# EAGLE board APU_PayloadBoard_Footprint (EAGLE 9.7.0)
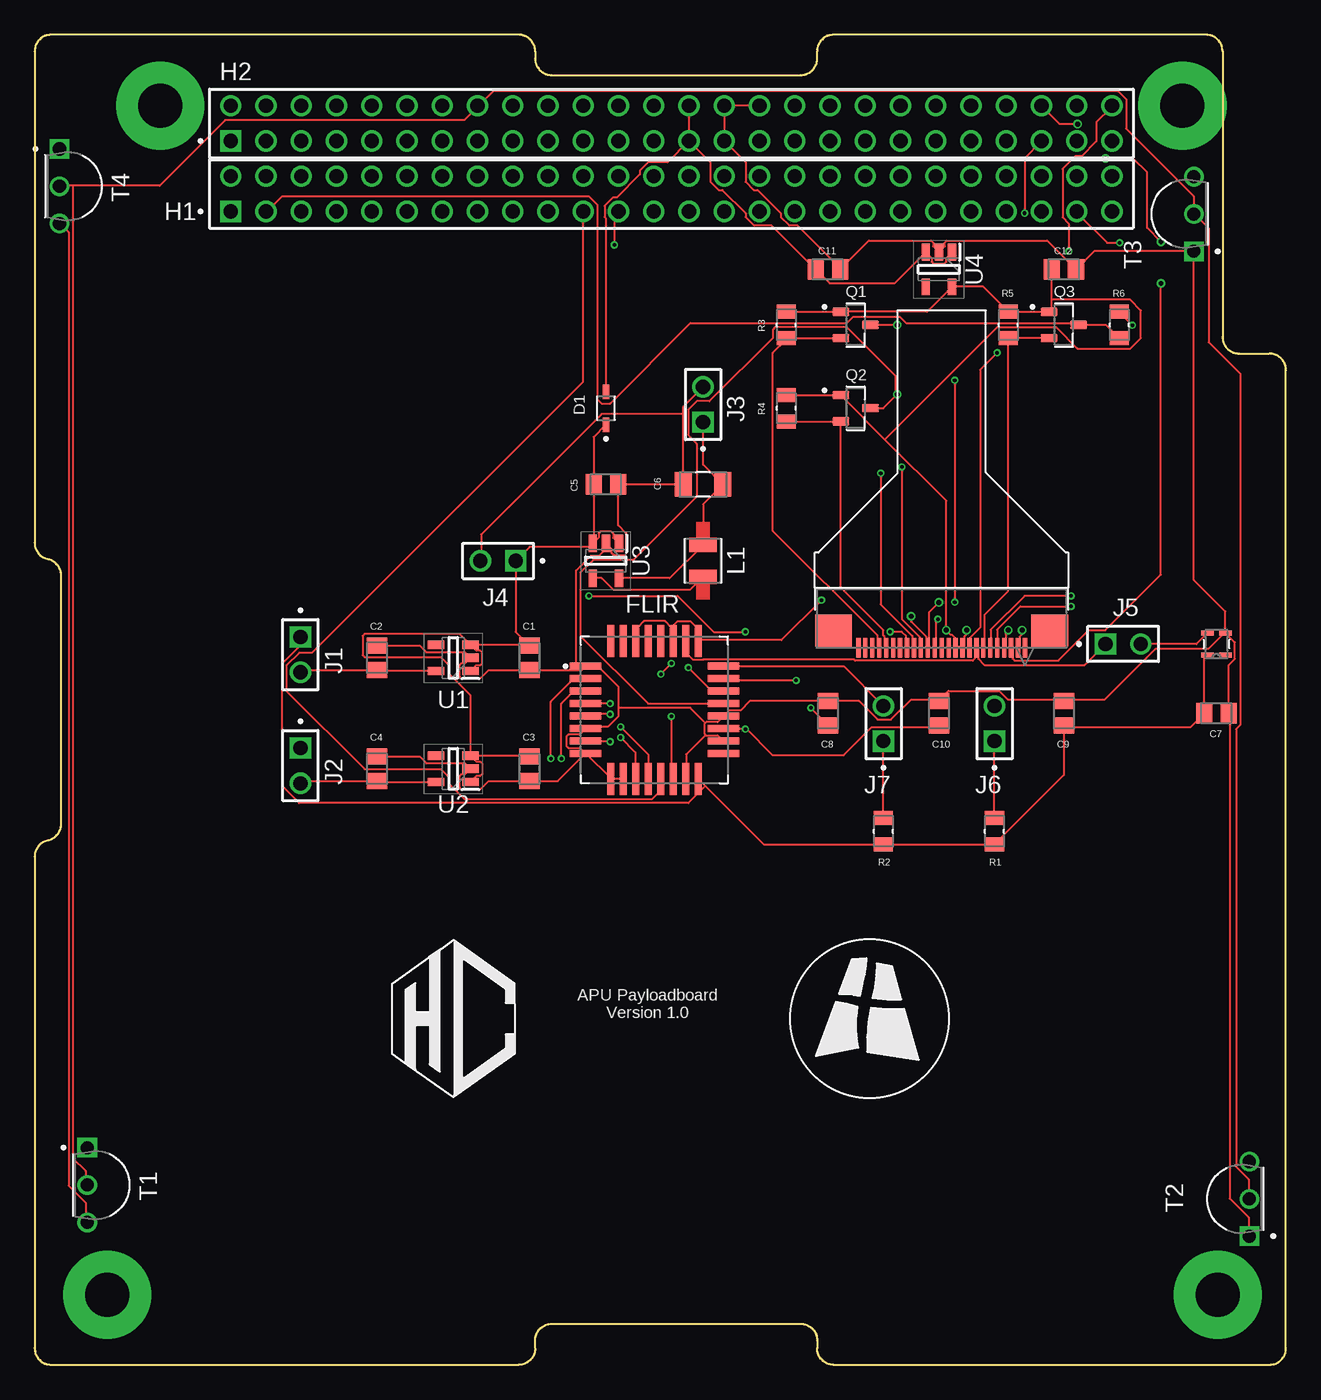
[diagram p0: board, top side]
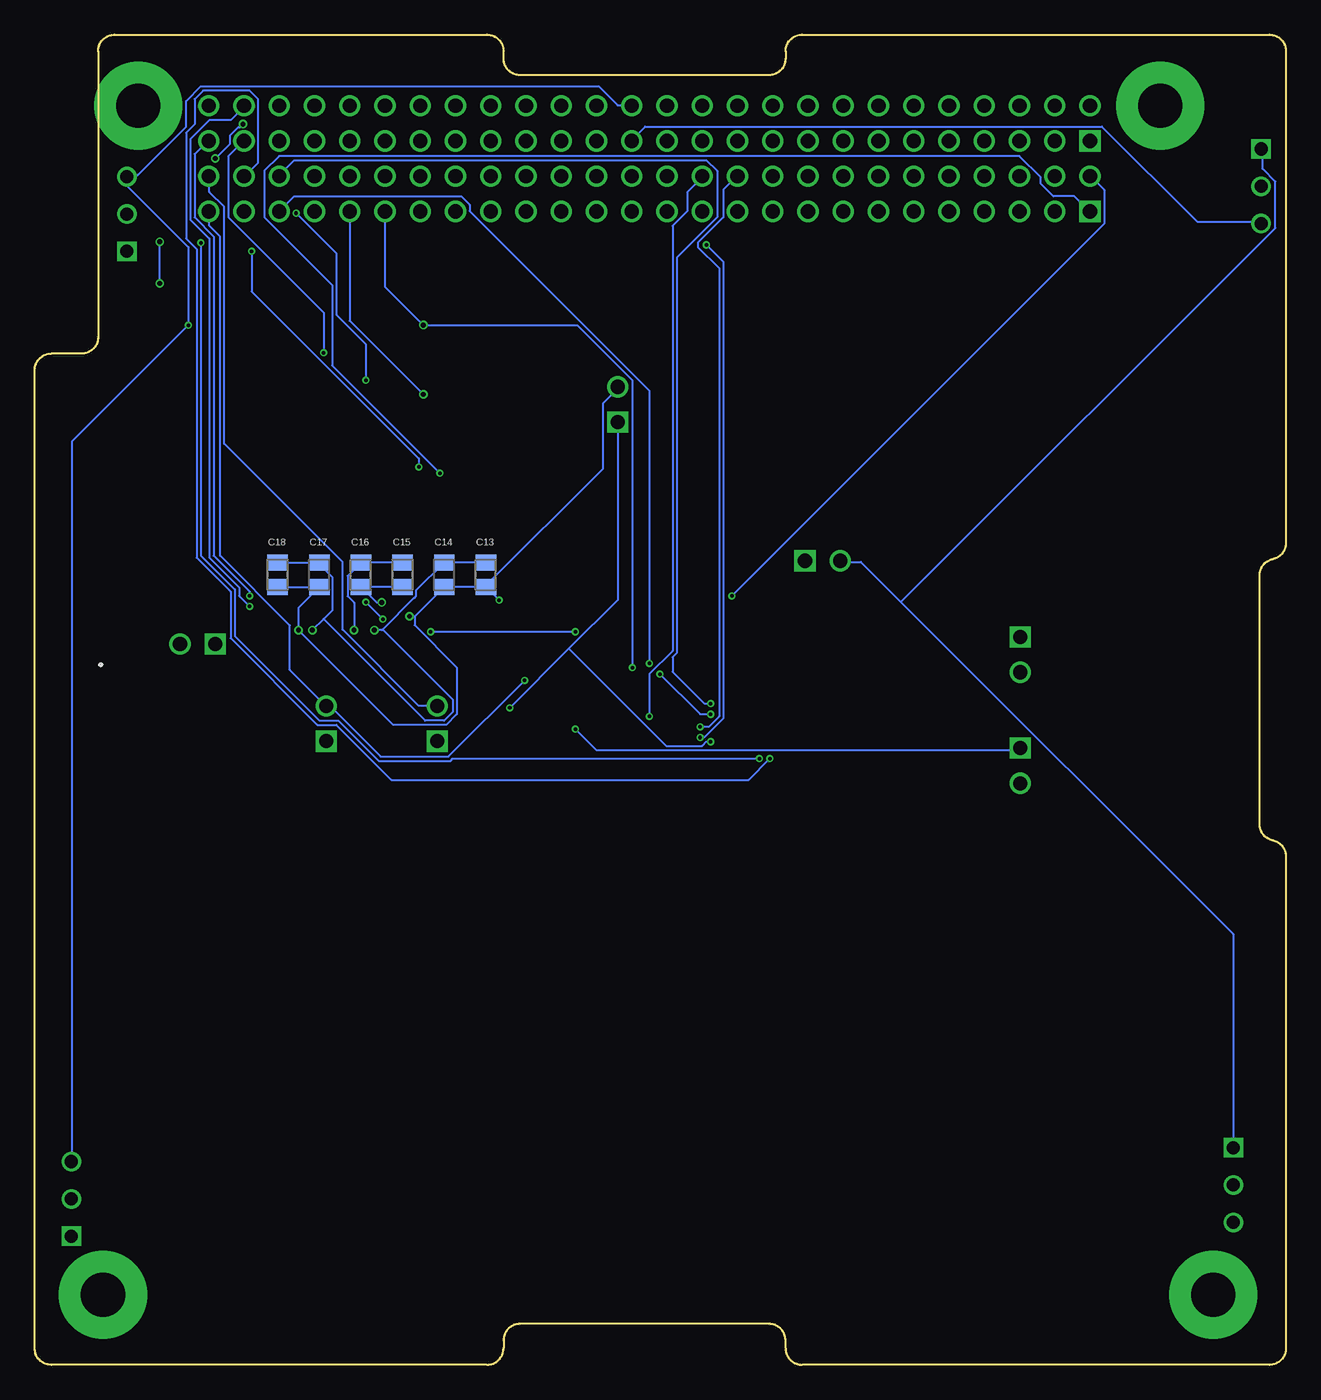
[diagram p1: board, bottom side, seen from below]

Size 90.17 x 95.89 mm. Coordinates in mm from the lower left corner, seen from the top.
Outline: 57.58,0 88.98,0 arc90 90.17,1.19 90.17,71.7 arc90 88.98,72.9 86.79,72.9 arc-90 85.6,74.09 85.6,94.69 arc90 84.4,95.88 57.58,95.88 arc90 56.39,94.69 56.39,94.16 arc-90 55.19,92.96 37.26,92.96 arc-90 36.07,94.16 36.07,94.69 arc90 34.87,95.88 1.19,95.88 arc90 0,94.69 0,59.25 arc78 0.95,58.08 arc-78 1.91,56.91 1.91,38.98 arc-78 0.95,37.81 arc78 0,36.64 0,1.19 arc90 1.19,0 34.87,0 arc90 36.07,1.19 36.07,1.76 arc-90 37.26,2.95 55.19,2.95 arc-90 56.39,1.76 56.39,1.19 arc90 57.58,0
Copper layers (1*16): Top 0.035559375mm / dielectric 1.6mm / Bottom 0.035559375mm
Design rules "oshpark-2layer": minimum track width 6mil, minimum drill 10mil, track to track 6mil, track to pad 6mil, pad to pad 6mil, via to via 6mil, smd to smd 6mil, copper to edge 15mil, drill to drill 6mil, minimum pad ring 5mil, minimum via ring 5mil, stop-mask expansion 2.5mil, vias tented up to drill 0mil, thermal gap 10mil

## Footprints (pad centres in the part's own frame; a part is rotated, then mirrored left to right if it is on the bottom)
CAPC2012X94N = smd 1.16 x 1.47: 1 -0.88,0; 2 0.88,0
CAPC2012X152N = smd 1.16 x 1.47: 1 -0.88,0; 2 0.88,0
CAPC3216X180N = smd 1.21 x 1.77: 1 -1.428,0; 2 1.428,0
SOD2513X120N = smd 1.04 x 0.46: A 1.19,0; C -1.19,0
MOLEX_105028-1001 = smd 2.286 x 0.5: 1 -4.97,3.15; 2 -4.97,2.25; 3 -4.97,1.35; 4 -4.97,0.45; 5 -4.97,-0.45; 6 -4.97,-1.35; 7 -4.97,-2.25; 8 -4.97,-3.15; 17 4.97,-3.15; 18 4.97,-2.25; 19 4.97,-1.35; 20 4.97,-0.45; 21 4.97,0.45; 22 4.97,1.35; 23 4.97,2.25; 24 4.97,3.15 | smd 0.5 x 2.286: 9 -3.15,-4.97; 10 -2.25,-4.97; 11 -1.35,-4.97; 12 -0.45,-4.97; 13 0.45,-4.97; 14 1.35,-4.97; 15 2.25,-4.97; 16 3.15,-4.97; 25 3.15,4.97; 26 2.25,4.97; 27 1.35,4.97; 28 0.45,4.97; 29 -0.45,4.97; 30 -1.35,4.97; 31 -2.25,4.97; 32 -3.15,4.97
SAMTEC_ESQ-126-37-G-D--NUMBERED-FOR-CUBESAT-BUS = drill 1.02 pad 1.37 square: 01 0,0 | drill 1.02 pad 1.37: 02 0,2.54; 03 2.54,0; 04 2.54,2.54; 05 5.08,0; 06 5.08,2.54; 07 7.62,0; 08 7.62,2.54; 09 10.16,0; 10 10.16,2.54; 11 12.7,0; 12 12.7,2.54; 13 15.24,0; 14 15.24,2.54; 15 17.78,0; 16 17.78,2.54; 17 20.32,0; 18 20.32,2.54; 19 22.86,0; 20 22.86,2.54; 21 25.4,0; 22 25.4,2.54; 23 27.94,0; 24 27.94,2.54; 25 30.48,0; 26 30.48,2.54; 27 33.02,0; 28 33.02,2.54; 29 35.56,0; 30 35.56,2.54; 31 38.1,0; 32 38.1,2.54; 33 40.64,0; 34 40.64,2.54; 35 43.18,0; 36 43.18,2.54; 37 45.72,0; 38 45.72,2.54; 39 48.26,0; 40 48.26,2.54; 41 50.8,0; 42 50.8,2.54; 43 53.34,0; 44 53.34,2.54; 45 55.88,0; 46 55.88,2.54; 47 58.42,0; 48 58.42,2.54; 49 60.96,0; 50 60.96,2.54; 51 63.5,0; 52 63.5,2.54
SAMTEC_TSW-102-05-G-S = drill 1.02 pad 1.37 square: 01 0,0 | drill 1.02 pad 1.37: 02 2.54,0
CON25_1X25_DR_SFV_JAE = smd 0.305 x 1.397: 1 6,-2.095; 2 5.5,-2.095; 3 5,-2.095; 4 4.5,-2.095; 5 4,-2.095; 6 3.5,-2.095; 7 3,-2.095; 8 2.5,-2.095; 9 2,-2.095; 10 1.5,-2.095; 11 1,-2.095; 12 0.5,-2.095; 13 0,-2.095; 14 -0.5,-2.095; 15 -1,-2.095; 16 -1.5,-2.095; 17 -2,-2.095; 18 -2.5,-2.095; 19 -3,-2.095; 20 -3.5,-2.095; 21 -4,-2.095; 22 -4.5,-2.095; 23 -5,-2.095; 24 -5.5,-2.095; 25 -6,-2.095 | smd 2.642 x 2.311: 26 -7.785,-0.851; 27 7.785,-0.851
IND_LQH32CN4R7M23L = smd 1 x 2: 1 -1.15,0; 2 1.15,0
MT_125_250 = drill 3.175 pad 6.35: 1 0,0
SOT95P240X111-3N = smd 1.23 x 0.6: 1 -1.06,0.95; 2 -1.06,-0.95; 3 1.06,0
RESC2012X65N = smd 1.01 x 1.38: 1 -0.95,0; 2 0.95,0
DS18B20+T&R = drill 0.94 pad 1.41 square: 1 -2.69,-1.37 | drill 0.94 pad 1.41: 2 0,-1.37; 3 2.69,-1.37
SOT95P282X145-5N = smd 1.2 x 0.6: 1 -1.25,0.95; 2 -1.25,0; 3 -1.25,-0.95; 4 1.25,-0.95; 5 1.25,0.95
SOT95P280X110-5N = smd 1.25 x 0.6: 1 -1.25,0.95; 2 -1.25,0; 3 -1.25,-0.95; 4 1.25,-0.95; 5 1.25,0.95
SON4_TG2016SMN_25.0000M-MCGNNM = smd 0.914 x 0.356: 1 -0.648,0.8; 2 -0.648,-0.8; 3 0.648,-0.8; 4 0.648,0.8

## Placement (x,y rotation side)
C1  08053C105KAT2A  [CAPC2012X94N]  35.66,50.96 270 top
C2  08053C105KAT2A  [CAPC2012X94N]  24.66,50.96 90 top
C3  08053C105KAT2A  [CAPC2012X94N]  35.66,42.96 270 top
C4  08053C105KAT2A  [CAPC2012X94N]  24.66,42.96 90 top
C5  0805ZC106KAT2A  [CAPC2012X152N]  41.16,63.46 0 top
C6  JMK316BJ226ML-T  [CAPC3216X180N]  48.16,63.46 180 top
C7  08053C104KAT2A  [CAPC2012X94N]  85.16,46.96 0 top
C8  08053C104KAT2A  [CAPC2012X94N]  57.16,46.96 90 top
C9  08053C104KAT2A  [CAPC2012X94N]  74.16,46.96 90 top
C10  08053C104KAT2A  [CAPC2012X94N]  65.16,46.96 90 top
C11  08053C105KAT2A  [CAPC2012X94N]  57.16,78.96 0 top
C12  08053C105KAT2A  [CAPC2012X94N]  74.16,78.96 0 top
C13  08053C104KAT2A  [CAPC2012X94N]  57.66,56.96 270 bottom
C14  0805ZC106KAT2A  [CAPC2012X152N]  60.66,56.96 270 bottom
C15  08053C104KAT2A  [CAPC2012X94N]  63.66,56.96 270 bottom
C16  0805ZC106KAT2A  [CAPC2012X152N]  66.66,56.96 270 bottom
C17  08053C104KAT2A  [CAPC2012X94N]  69.66,56.96 270 bottom
C18  0805ZC106KAT2A  [CAPC2012X152N]  72.66,56.96 270 bottom
D1  BAT760-7  [SOD2513X120N]  41.16,68.96 90 top
FLIR  105028-1001  [MOLEX_105028-1001]  44.66,47.21 0 top
H1  CSK-H1  [SAMTEC_ESQ-126-37-G-D--NUMBERED-FOR-CUBESAT-BUS]  14.13,83.14 0 top
H2  CSK-H2  [SAMTEC_ESQ-126-37-G-D--NUMBERED-FOR-CUBESAT-BUS]  14.13,88.22 0 top
J1  TSW-102-05-G-S  [SAMTEC_TSW-102-05-G-S]  19.16,52.46 270 top
J2  TSW-102-05-G-S  [SAMTEC_TSW-102-05-G-S]  19.16,44.46 270 top
J3  TSW-102-05-G-S  [SAMTEC_TSW-102-05-G-S]  48.16,67.96 90 top
J4  TSW-102-05-G-S  [SAMTEC_TSW-102-05-G-S]  34.66,57.96 180 top
J5  TSW-102-05-G-S  [SAMTEC_TSW-102-05-G-S]  77.16,51.96 0 top
J6  TSW-102-05-G-S  [SAMTEC_TSW-102-05-G-S]  69.16,44.96 90 top
J7  TSW-102-05-G-S  [SAMTEC_TSW-102-05-G-S]  61.16,44.96 90 top
J8  SFV25R-1STE1LFCON25_1X25_DR_SFV_JAE  [CON25_1X25_DR_SFV_JAE]  65.36,53.79 0 top
L1  LQH32CN4R7M23L  [IND_LQH32CN4R7M23L]  48.16,57.96 90 top
MT1  MOUNTING_HOLE-125_250_ROUND  [MT_125_250]  5.24,5.04 0 top
MT2  MOUNTING_HOLE-125_250_ROUND  [MT_125_250]  85.25,5.04 0 top
MT3  MOUNTING_HOLE-125_250_ROUND  [MT_125_250]  9.05,90.76 0 top
MT4  MOUNTING_HOLE-125_250_ROUND  [MT_125_250]  82.71,90.76 0 top
Q1  BSS138  [SOT95P240X111-3N]  59.16,74.96 0 top
Q2  BSS138  [SOT95P240X111-3N]  59.16,68.96 0 top
Q3  BSS138  [SOT95P240X111-3N]  74.16,74.96 0 top
R1  RMCF0805JT100K  [RESC2012X65N]  69.16,38.46 90 top
R2  RMCF0805JT10K0  [RESC2012X65N]  61.16,38.46 90 top
R3  RMCF0805JT10K0  [RESC2012X65N]  54.16,74.96 90 top
R4  RMCF0805JT10K0  [RESC2012X65N]  54.16,68.96 90 top
R5  RMCF0805JT10K0  [RESC2012X65N]  70.16,74.96 90 top
R6  RMCF0805JT10K0  [RESC2012X65N]  78.16,74.96 90 top
T1  DS18B20+T&R  [DS18B20+T&R]  5.16,12.96 270 top
T2  DS18B20+T&R  [DS18B20+T&R]  86.16,11.96 90 top
T3  DS18B20+T&R  [DS18B20+T&R]  82.16,82.96 90 top
T4  DS18B20+T&R  [DS18B20+T&R]  3.16,84.96 270 top
U1  AP2127K-2.8TRG1  [SOT95P282X145-5N]  30.16,50.96 180 top
U2  AP2127K-2.8TRG1  [SOT95P282X145-5N]  30.16,42.96 180 top
U3  TPS62227DDCT  [SOT95P280X110-5N]  41.16,57.96 270 top
U4  AP2127K-2.8TRG1  [SOT95P282X145-5N]  65.16,78.96 270 top
U$1  [APU-LOGO]  60.16,24.96 0 top
U$2  [NATHANAEL-LOGO]  30.16,24.96 0 top
Y1  TG2016SMN_25.0000M-MCGNNM3SON4_TG2016SMN_25.0000M-MCGNNM  [SON4_TG2016SMN_25.0000M-MCGNNM]  85.16,51.96 180 top

## Library data of the parts
C1-C4 C11 C12 = apu-csk-payloadboard; AVAILABILITY: In Stock; DESCRIPTION: 1 µF ±10% 25V Ceramic Capacitor X7R 0805 (2012 Metric); MF: AVX; MP: 08053C105KAT2A; PACKAGE: 2012 AVX; PRICE: None; PURCHASE-URL: https://pricing.snapeda.com/search/part/08053C105KAT2A/?ref=eda
C5 C14 C16 C18 = apu-csk-payloadboard; AVAILABILITY: In Stock; DESCRIPTION: 10 µF ±10% 10V Ceramic Capacitor X7R 0805 (2012 Metric); MF: AVX; MP: 0805ZC106KAT2A; PACKAGE: 2012 AVX; PRICE: None
C6 = apu-csk-payloadboard; AVAILABILITY: In Stock; DESCRIPTION: 22 µF ±20% 6.3V Ceramic Capacitor X5R 1206 (3216 Metric); MF: Taiyo Yuden; MP: JMK316BJ226ML-T; PACKAGE: 3216 Taiyo Yuden; PRICE: None; PURCHASE-URL: https://pricing.snapeda.com/search?q=JMK316BJ226ML-T&ref=eda
C7-C10 C13 C15 C17 = apu-csk-payloadboard; AVAILABILITY: In Stock; DESCRIPTION: 0.1 µF ±10% 25V Ceramic Capacitor X7R 0805 (2012 Metric); MF: AVX; MP: 08053C104KAT2A; PACKAGE: 2012 AVX; PRICE: None; PURCHASE-URL: https://pricing.snapeda.com/search/part/08053C104KAT2A/?ref=eda
D1 = apu-csk-payloadboard; AVAILABILITY: In Stock; DESCRIPTION: Diode Schottky 30 V 1A Surface Mount SOD-323; MF: Diodes Inc.; MP: BAT760-7; PACKAGE: SOD-323 Diodes Inc.; PRICE: None; PURCHASE-URL: https://pricing.snapeda.com/search?q=BAT760-7&ref=eda
FLIR = apu-csk-payloadboard; AVAILABILITY: In Stock; DESCRIPTION: 32 (4 x 8) Pos Camera Socket Socket Gold Surface Mount; MF: Molex; MP: 1050281001; PACKAGE: None; PRICE: None; PURCHASE-URL: https://pricing.snapeda.com/search?q=1050281001&ref=eda
H1 H2 MT1-MT4 T1-T4 = apu-csk-payloadboard
J1-J7 = apu-csk-payloadboard; AVAILABILITY: In Stock; DESCRIPTION: TSW - Samtec 2.54mm Pin Header 8.51mm Overall Pin Length (05) - Fast Stock; MF: Samtec Inc.; MP: TSW-102-05-G-S; PACKAGE: None; PRICE: None; PURCHASE-URL: https://pricing.snapeda.com/search/part/TSW-102-05-G-S/?ref=eda
J8 = apu-csk-payloadboard; COPYRIGHT: Copyright (C) 2023 Ultra Librarian. All rights reserved.; MANUFACTURER_PART_NUMBER: SFV25R-1STE1LF; MFR_NAME: JAE Electronics
L1 = apu-csk-payloadboard; AVAILABILITY: In Stock; DESCRIPTION: 4.7µH Unshielded Wirewound Inductor 450mA 260mOhm Max Nonstandard; MF: Murata Electronics; MP: LQH32CN4R7M23L; PACKAGE: NONSTANDARD; PRICE: None; PURCHASE-URL: https://pricing.snapeda.com/search?q=LQH32CN4R7M23L&ref=eda
Q1-Q3 = apu-csk-payloadboard; AVAILABILITY: In Stock; DESCRIPTION: N-Channel 50 V 220mA (Ta) 360mW (Ta) Surface Mount SOT-23-3; MF: onsemi; MP: BSS138; PACKAGE: None; PRICE: None
R1 = apu-csk-payloadboard; AVAILABILITY: In Stock; DESCRIPTION: 100 kOhms ±5% 0.125W, 1/8W Chip Resistor 0805 (2012 Metric) Automotive AEC-Q200 Thick Film; MF: Stackpole Electronics Inc; MP: RMCF0805JT100K; PACKAGE: 2012 Stackpole; PRICE: None; PURCHASE-URL: https://pricing.snapeda.com/search?q=RMCF0805JT100K&ref=eda
R2-R6 = apu-csk-payloadboard; AVAILABILITY: In Stock; DESCRIPTION: 10 kOhms ±5% 0.125W, 1/8W Chip Resistor 0805 (2012 Metric) Automotive AEC-Q200 Thick Film; MF: Stackpole Electronics Inc; MP: RMCF0805JT10K0; PACKAGE: 2012 Stackpole; PRICE: None; PURCHASE-URL: https://pricing.snapeda.com/search/part/RMCF0805JT10K0/?ref=eda
U1 U2 U4 = apu-csk-payloadboard; DESCRIPTION: LDO Voltage Regulators 300mA Hi Speed LDO 6.5V 450mA; HEIGHT: 1.45mm; MANUFACTURER_NAME: Diodes Inc.; MANUFACTURER_PART_NUMBER: AP2127K-2.8TRG1; MOUSER_PART_NUMBER: 621-AP2127K-2.8TRG1; MOUSER_PRICE-STOCK: https://www.mouser.co.uk/ProductDetail/Diodes-Incorporated/AP2127K-2.8TRG1?qs=dZoB6MK9LKNOmVxYIQZFIA%3D%3D
U3 = apu-csk-payloadboard; DESCRIPTION: Texas Instruments, TPS62227DDCT Step-Down Switching Regulator 400mA, 1.2 V, 5-Pin SOT; HEIGHT: 1.1mm; MANUFACTURER_NAME: Texas Instruments; MANUFACTURER_PART_NUMBER: TPS62227DDCT; MOUSER_PART_NUMBER: 595-TPS62227DDCT; MOUSER_PRICE-STOCK: https://www.mouser.co.uk/ProductDetail/Texas-Instruments/TPS62227DDCT?qs=LVErsypW30zMBlHvllbqLA%3D%3D
U$1 = APU-LOGO
U$2 = NATHANAEL-LOGO
Y1 = apu-csk-payloadboard; COPYRIGHT: Copyright (C) 2023 Ultra Librarian. All rights reserved.; MANUFACTURER_PART_NUMBER: TG2016SMN 25.0000M-MCGNNM3; MFR_NAME: Epson

## Nets
2.8SCL: J8.21 Q2.2 R4.1
2.8SDA: J8.22 Q1.2 R3.1
2.8TRIG: J8.7 Q3.2 R5.1
2.8V: C12.1 C13.1 C14.1 C15.1 C16.1 C17.1 C18.1 J8.4 J8.10 J8.11 Q1.1 Q2.1 Q3.1 R3.2 R4.2 R5.2 U4.5
3.3V: C11.1 D1.A H2.27 H2.28 R6.2 T1.3 T2.3 T3.3 T4.3 U4.1 U4.3
CIPO: FLIR.12 H1.22
COPI: FLIR.11 H1.23
CS-FLIR: FLIR.14 H1.24
D0: H2.47 J8.14
D1: H2.48 J8.3
D2: H2.49 J8.9
D3: H2.50 J8.5
DQ-TEMP: H2.16 T1.2 T2.2 T3.2 T4.2
GND: C1.2 C2.2 C3.2 C4.2 C5.2 C6.2 C7.2 C8.2 C9.2 C10.2 C11.2 C12.2 C13.2 C14.2 C15.2 C16.2 C17.2 C18.2 FLIR.1 FLIR.6 FLIR.8 FLIR.9 FLIR.10 FLIR.15 FLIR.18 FLIR.20 FLIR.25 FLIR.27 FLIR.30 H2.29 H2.30 H2.32 J3.02 J4.02 J8.2 J8.15 T1.1 T2.1 T3.1 T4.1 U1.2 U2.2 U3.2 U4.2 Y1.2
GPIO-0: FLIR.5 H1.47
GPIO-1: FLIR.4 H1.48
GPIO-2: FLIR.3 H1.49
GPIO-3: FLIR.2 H1.50
HSYNC: H2.52 J8.16
INT: H1.02 J8.18
MASTER_CLK: FLIR.26 J5.01 J8.8
N$1: L1.1 U3.4
N$2: J6.01 R1.2
N$3: J7.01 R2.2
PCLKO: H1.01 J8.17
PW_DWN_L: FLIR.23 H1.51 J6.02
RESET_L: FLIR.24 H1.52 J7.02
SCK: FLIR.13 H1.21
SCL: FLIR.21 H1.43 Q2.3
SDA: FLIR.22 H1.41 Q1.3
TRIG: H1.03 Q3.3 R6.1
U1_OUT: C2.1 J1.02 U1.5
U2_OUT: C4.1 J2.02 U2.5
VCC12: C6.1 C8.1 FLIR.7 J3.01 L1.2 U3.5
VCC28: C10.1 FLIR.19 J2.01
VCC28_IO: C7.1 C9.1 FLIR.16 J1.01 R1.1 R2.1 Y1.4
VIN: C1.1 C3.1 C5.1 D1.C J4.01 U1.1 U1.3 U2.1 U2.3 U3.1 U3.3
VSYNC: H2.51 J8.6
Y1_OUT: J5.02 Y1.3

## Tracks (layer width: path | path; a pad name or v marks a point on that pad's centre or on a via)
2.8SCL
  Top 0.152: R4.1 Q2.2 58.1,56.02 61.16,52.96 61.16,52.57 61.24,52.49 61.24,51.81 J8.21
2.8SDA
  Top 0.152: Q1.2 R3.1 54.11,73.87 53.19,72.96 53.19,60.12 60.74,52.57 60.74,51.81 J8.22
2.8TRIG
  Top 0.152: Q3.2 R5.1 70.11,73.87 70.11,55.74 68.43,54.06 68.43,51.78 J8.7
2.8V  (via drill 0.35)
  Top 0.152: R3.2 Q1.1 64.31,75.91 U4.5 68.36,77.71 R5.2 Q3.1 73.28,76.09 73.28,76.77 | R4.2 Q2.1 58.22,69.76 61.27,66.71 | 73.28,76.77 C12.1 | v67.16,52.96 67.16,52.67 66.98,52.49 66.98,51.81 J8.10 66.76,51.78 66.45,51.78 J8.11 66.36,52.37 66.11,52.62 66.03,52.62 v65.69,52.96 65.69,52.99 65.69,62.29 61.27,66.71 | J8.4 69.96,51.78 69.96,52.69 70.11,52.84 v70.16,52.96 | 73.28,76.77 78.95,76.77 79.71,76.01 79.71,74.03 78.95,73.26 75.14,73.26 73.62,74.79 69.35,74.79 61.27,66.71
  Bottom 0.152: C13.1 C14.1 62.7,55.8 62.7,55.4 62.83,55.27 62.85,55.27 65.1,53.02 | C15.1 C16.1 67.62,56.88 67.62,55.4 67.16,54.94 v67.16,52.96 | C18.1 C17.1 69.66,57.72 68.7,56.75 68.7,54.42 69.36,53.76 | 65.1,53.02 65.16,52.96 v65.69,52.96 | 69.36,53.76 v70.16,52.96 | 69.36,53.76 62.03,46.44 60.66,46.44 60.05,47.05 60.05,47.97 65.1,53.02
3.3V  (via drill 0.25)
  Top 0.152: H2.27 45.6,86.68 44.2,86.68 43.62,86.1 43.62,85.83 41.93,84.14 41.66,84.14 41.08,83.56 41.08,82.73 41.16,82.65 D1.A | H2.28 H2.27 | H2.27 48.7,86.68 48.7,85.27 49.28,84.69 49.55,84.69 51.24,83 51.24,82.73 51.82,82.15 53.09,82.15 C11.1 57.28,77.96 61.96,77.96 U4.3 64.63,79.79 64.63,79.51 64.76,79.38 65.55,79.38 65.69,79.51 65.69,79.79 U4.1 | T1.3 3.66,10.32 3.66,11.69 2.45,12.91 2.45,81.65 1.84,82.26 T4.3 | v79.1,74.94 78.19,75.85 R6.2
  Bottom 0.152: T2.3 87.48,14.74 87.48,66.56 v79.1,74.94 79.1,80.58 83.52,85 83.52,85.61 T3.3 83.52,85.76 82.76,85.76 79.26,89.27 79.26,91.09 78.19,92.16 49.54,92.16 48.17,90.79 47.25,90.79 H2.28 | T4.3 1.84,82.41 6.41,82.41 13.27,89.27 46.18,89.27 47.1,88.35 H2.27
CIPO  (via drill 0.25)
  Top 0.152: v42.22,45.98 44.2,44 44.2,42.33 FLIR.12
  Bottom 0.152: v42.22,45.98 41.61,45.98 40.85,46.75 40.85,79.06 42.37,80.58 42.37,80.88 40.55,82.71 40.55,84.69 39.63,85.61 H1.22
COPI  (via drill 0.25)
  Top 0.152: v42.22,45.22 43.29,44.16 43.29,42.33 FLIR.11 | v41.76,80.73 41.76,82.71 42.07,83.02 H1.23
  Bottom 0.152: v42.22,45.22 41.92,45.22 40.55,46.59 40.55,79.51 v41.76,80.73
CS-FLIR  (via drill 0.25)
  Top 0.152: v45.88,46.75 45.88,42.33 FLIR.14
  Bottom 0.152: v45.88,46.75 45.88,49.79 44.2,51.47 44.2,82.1 43.14,83.17 43.14,84.54 42.07,85.61 H1.24
D0  (via drill 0.25)
  Top 0.152: v65.08,53.76 64.93,53.6 64.93,51.78 J8.14 | v66.3,70.98 v66.3,54.98 | v71.33,83.02 71.33,86.98 72.55,88.2 H2.47
  Bottom 0.152: v66.3,54.98 v65.08,53.76 | v66.3,70.98 66.3,73.57 68.43,75.7 68.43,80.12 v71.33,83.02
D1  (via drill 0.35)
  Top 0.152: J8.3 70.48,51.57 70.48,50.9 70.61,50.77 73.77,50.77 75.97,52.96 77.16,52.96 81.16,56.96 v81.16,77.96 | v81.16,80.96 80.16,81.96 80.16,85.96 79.16,86.96 v77.16,86.96 | v75.16,89.44 73.87,89.44 H2.48
  Bottom 0.152: v81.16,77.96 v81.16,80.96 | v77.16,86.96 76.08,88.04 76.08,88.64 75.5,89.22 75.39,89.22 v75.16,89.44
D2  (via drill 0.25)
  Top 0.152: v69.35,72.96 68.13,71.74 68.13,53.15 67.37,52.39 67.37,51.78 J8.9
  Bottom 0.152: v69.35,72.96 69.35,75.85 76.21,82.71 76.21,87.13 75.14,88.2 H2.49
D3  (via drill 0.25)
  Top 0.152: v74.68,54.67 71.03,54.67 69.35,52.99 69.35,51.78 J8.5
  Bottom 0.152: v74.68,54.67 75.45,55.43 75.45,56.04 77.58,58.18 77.58,81.19 78.95,82.56 78.95,88.35 77.58,89.72 76.05,89.72 75.14,90.64 H2.50
DQ-TEMP
  Top 0.152: 2.75,85 9,85 13.72,89.72 30.94,89.72 31.86,90.64 H2.16 32.01,90.79 33.08,91.86 78.04,91.86 78.65,91.25 78.65,89.11 83.52,84.24 83.52,83.02 T3.2 83.67,82.87 84.59,81.95 84.59,73.72 86.88,71.44 86.88,46.14 86.57,45.83 86.57,14.29 87.48,13.37 87.48,12 T2.2 | 2.75,85 1.84,85 T4.2 | 2.75,85 2.75,14.89 3.66,13.98 3.66,13.07 T1.2
GND  (via drill 0.25, 0.35)
  Top 0.152: Y1.2 86.49,52.07 86.49,50.89 86.04,50.43 C7.2 86.11,46.9 86.11,12 87.48,10.63 87.48,9.41 T2.1 | FLIR.8 37.71,42.08 C3.2 32.7,42.08 32.1,41.48 30.71,41.48 30.58,41.61 30.58,42.4 30.71,42.54 30.99,42.54 U2.2 30.99,43.38 28.21,43.38 27.76,43.84 C4.2 | FLIR.10 FLIR.9 41.46,42.33 39.78,44 FLIR.8 | 48.33,46.28 48.39,46.34 49.21,46.34 FLIR.20 50.05,47.18 50.87,47.18 51.53,47.84 C8.2 59.41,47.84 60.75,46.51 61.71,46.51 63.16,47.96 65.04,47.96 C10.2 65.23,47.97 65.84,48.58 69.5,48.58 70.11,47.97 74.07,47.97 C9.2 74.23,47.97 77.12,47.97 80.78,51.62 84.59,51.62 85.66,52.69 Y1.2 | 48.33,46.28 48.26,46.2 48.26,45.51 48.39,45.38 | 48.39,45.38 49.21,45.38 FLIR.18 | FLIR.8 39.27,44.48 38.45,44.48 38.32,44.61 38.32,45.3 38.45,45.44 39.27,45.44 FLIR.6 39.78,45.98 41.31,45.98 42.07,46.75 42.07,47.36 | C2.2 27.76,51.84 28.21,51.38 30.99,51.38 U1.2 30.99,50.54 30.71,50.54 30.58,50.4 30.58,49.61 30.71,49.48 32.1,49.48 32.7,50.08 C1.2 39.02,50.08 | 46.73,68.54 C6.2 C5.2 42.04,60.53 42.64,59.93 42.64,58.49 42.5,58.36 41.71,58.36 41.58,58.49 41.58,58.79 U3.2 41.16,59.09 41.16,58.79 40.7,58.33 40.09,58.33 39.02,57.26 39.02,50.08 | 46.73,68.54 46.73,69.07 J3.02 | 39.02,50.08 39.41,50.08 FLIR.1 39.78,50.25 40.7,50.25 42.07,48.88 42.07,47.36 | Y1.2 85.81,54.31 83.53,56.59 T3.1 76.35,80.27 C12.2 72.96,81.04 65.71,81.04 65.58,80.9 65.58,80.63 U4.2 64.74,80.63 64.74,80.9 64.6,81.04 60.12,81.04 58.1,79.02 | 58.1,79.02 C11.2 | J8.2 70.98,51.81 70.98,52.49 71.16,52.67 v71.16,52.96 | H2.32 H2.30 H2.29 51.24,86.68 51.24,85.27 51.82,84.69 52.09,84.69 53.78,83 53.78,82.73 54.36,82.15 54.97,82.15 58.1,79.02
  Top 0.152: v63.16,53.96 63.16,53.57 64.24,52.49 64.24,51.81 J8.15 64.48,51.81 64.48,54.28 v65.16,54.96 | 45.88,53.15 45.42,53.6 43.9,53.6 43.44,53.15 43.44,52.23 FLIR.30 | 45.88,53.15 45.88,52.23 FLIR.27 45.88,53.15 | 45.88,53.15 46.34,53.6 47.25,53.6 47.71,53.15 47.71,52.23 FLIR.25 47.86,52.23 53.8,52.23 v56.7,55.13 | FLIR.15 46.95,42.33 46.95,44 48.32,45.37 48.39,45.38 | 42.07,47.36 47.25,47.36 48.33,46.28 | 46.73,68.54 40.85,68.54 32.16,59.85 32.16,58.02 J4.02
  Bottom 0.152: C13.2 C14.2 62.78,53.96 | C15.2 C16.2 65.54,54.96 v65.16,54.96 | C18.2 C17.2 71.16,54.58 v71.16,52.96 71.03,52.84 64.32,46.14 60.51,46.14 59.75,46.9 59.75,50.27 62.8,53.31 62.8,53.91 62.78,53.96 | 62.78,53.96 v63.16,53.96 | 27.74,54.98 30.64,57.87 32.01,57.87 J4.02 | 27.74,54.98 3.82,31.05 3.82,15.66 T1.1 | 27.74,54.98 0.77,81.95 0.77,85.3 1.68,86.22 1.68,87.59 T4.1 | v56.7,55.13 57.61,56.04 C13.2 | C13.2 57.61,56.2 49.23,64.58 49.23,69.3 48.17,70.37 J3.02
GPIO-0  (via drill 0.25)
  Top 0.152: v41.46,46.9 39.78,46.9 FLIR.5 | v45.88,50.56 v45.12,49.79
  Bottom 0.152: v41.46,46.9 42.22,46.9 v45.12,49.79 | v45.88,50.56 45.88,70.22 58.83,83.17 58.83,83.63 59.44,84.24 71.48,84.24 72.55,83.17 H1.47
GPIO-1  (via drill 0.25)
  Top 0.152: v41.46,47.66 39.78,47.66 FLIR.4
  Bottom 0.152: v41.46,47.66 41.92,47.66 44.2,49.95 44.2,51.01 43.9,51.32 43.9,79.82 41,82.71 41,86.07 41.76,86.83 71.48,86.83 72.55,85.76 H1.48
GPIO-2  (via drill 0.25)
  Top 0.152: v37.95,43.7 37.95,47.66 38.72,48.42 39.63,48.42 FLIR.3 | v78.19,80.88 77.27,80.88 75.14,83.02 H1.49
  Bottom 0.152: v37.95,43.7 60.05,43.7 60.21,43.55 65.39,43.55 68.28,46.44 69.65,46.44 75.75,52.54 75.75,55.89 78.19,58.33 v78.19,80.88
GPIO-3  (via drill 0.25)
  Top 0.152: v37.19,43.7 37.19,47.81 38.72,49.34 39.63,49.34 FLIR.2
  Bottom 0.152: v37.19,43.7 38.72,42.17 64.47,42.17 68.43,46.14 69.81,46.14 76.05,52.39 76.05,55.74 78.49,58.18 78.49,80.43 79.26,81.19 79.26,88.81 78.65,89.42 78.65,91.25 78.04,91.86 74.68,91.86 74.07,91.25 74.07,86.68 74.99,85.76 H1.50
HSYNC  (via drill 0.25)
  Top 0.152: v62.49,64.73 62.49,53.76 63.86,52.39 63.86,51.78 J8.16 | v74.53,80.27 74.53,82.26 74.07,82.71 74.07,86.22 74.99,87.13 75.45,87.13 76.51,88.2 76.51,89.57 77.58,90.64 H2.52
  Bottom 0.152: v62.49,64.73 62.49,65.34 74.53,77.38 v74.53,80.27
INT  (via drill 0.25)
  Top 0.152: v51.21,52.84 48.93,52.84 46.34,55.43 v39.94,55.43 | J8.18 62.8,51.78 62.8,52.54 62.49,52.84 v61.64,52.84
  Bottom 0.152: v39.94,55.43 13.11,82.26 13.11,84.69 14.03,85.61 H1.02 | v51.21,52.84 v61.64,52.84
MASTER_CLK
  Top 0.152: FLIR.26 46.91,51.36 47.46,50.81 48.15,50.81 48.18,50.84 59.04,50.84 59.11,50.77 67.61,50.77 67.74,50.9 67.74,51.57 J8.8 67.98,51.57 67.98,50.9 68.42,50.46 75.66,50.46 J5.01
N$1
  Top 0.152: U3.4 40.86,56.71 41.71,55.86 47.21,55.86 L1.1
N$2
  Top 0.152: R1.2 J6.01
N$3
  Top 0.152: R2.2 J7.01
PCLKO  (via drill 0.25)
  Top 0.152: v60.97,64.27 60.97,54.82 63.25,52.54 63.25,51.78 J8.17
  Bottom 0.152: v60.97,64.27 68.74,72.04 68.74,77.84 73.62,82.71 73.62,86.07 72.55,87.13 19.21,87.13 17.69,85.61 17.69,85.15 16.77,84.24 15.25,84.24 14.18,83.17 H1.01
PW_DWN_L  (via drill 0.25)
  Top 0.152: v54.87,49.34 49.69,49.34 FLIR.23
  Bottom 0.152: v54.87,49.34 60.36,43.85 65.23,43.85 68.74,47.36 69.04,47.36 J6.02 69.2,47.51 71.79,50.1 71.79,53.3 76.82,58.33 76.82,81.34 77.58,82.1 77.58,83.02 H1.51
RESET_L
  Top 0.152: FLIR.24 58.3,50.36 J7.02
  Bottom 0.152: H1.52 77.58,85.61 77.58,84.54 76.51,83.47 76.51,66.41 67.98,57.87 67.98,52.99 62.49,47.51 61.27,47.51 J7.02
SCK
  Top 0.152: FLIR.13 44.97,42.17 44.97,41.26 44.51,40.8 30.94,40.8 29.88,41.87 29.88,42.33 29.27,42.94 23.78,42.94 18.14,48.58 18.14,50.4 19.06,51.32 19.97,51.32 39.48,70.83 39.48,83.02 H1.21
SCL  (via drill 0.35)
  Top 0.152: Q2.3 61.16,68.96 v62.16,69.96 62.03,70.06 62.03,71.28 58.53,74.79 53.35,74.79 53.19,74.64 53.19,74.03 48.62,69.45 47.71,69.45 47.1,68.84 47.1,67.02 47.71,66.41 47.71,62.6 43.14,58.02 40.24,58.02 39.33,57.11 39.33,52.54 44.2,47.66 49.54,47.66 FLIR.21
  Bottom 0.152: H1.43 67.47,75.27 v62.16,69.96
SDA  (via drill 0.25, 0.35)
  Top 0.152: v62.16,74.96 Q1.3 | v47.1,50.25 48.78,48.58 49.54,48.58 FLIR.22
  Bottom 0.152: H1.41 64.93,77.73 v62.16,74.96 62.03,74.94 51.06,74.94 47.1,70.98 v47.1,50.25
TRIG
  Top 0.152: R6.1 77.21,74.96 Q3.3 75.14,75.09 62.8,75.09 62.34,75.55 58.99,75.55 58.53,75.09 47.25,75.09 41.46,69.3 40.85,69.3 40.55,69.61 40.55,83.63 39.94,84.24 17.84,84.24 16.77,83.17 H1.03
U1_OUT
  Top 0.152: U1.5 24.73,50.01 C2.1 19.32,50.08 J1.02
U2_OUT
  Top 0.152: J2.02 19.32,42.08 C4.1 24.73,42.01 U2.5
VCC12  (via drill 0.25)
  Top 0.152: J3.01 48.16,64.89 C6.1 48.16,62.03 L1.2 45.76,56.71 U3.5 | v55.94,47.36 57.16,46.14 C8.1 | v41.46,44.92 39.78,44.92 FLIR.7
  Bottom 0.152: 51.67,51.62 48.17,55.13 48.17,67.93 J3.01 | 51.67,51.62 v55.94,47.36 | v41.46,44.92 41.76,44.92 42.07,44.61 44.66,44.61 51.67,51.62
VCC28  (via drill 0.25)
  Top 0.152: FLIR.19 51.26,45.86 | 51.26,45.86 53.16,43.96 58.31,43.96 60.3,45.95 65.03,45.95 C10.1 | v51.21,45.83 51.26,45.86
  Bottom 0.152: v51.21,45.83 49.69,44.31 19.21,44.31 J2.01
VCC28_IO
  Top 0.152: C9.1 74.16,45.96 | 74.16,45.96 74.16,42.51 R1.1 R2.1 52.54,37.51 48.32,41.72 | 74.16,45.96 83.28,45.96 C7.1 84.28,50.93 Y1.4 | FLIR.16 48.32,41.72 | 48.32,41.72 47.1,40.5 19.06,40.5 17.84,41.72 17.84,50.56 19.06,51.78 19.06,52.39 J1.01
VIN
  Top 0.152: U1.3 35.59,51.91 C1.1 34.66,52.84 J4.01 35.66,58.96 39.96,58.96 U3.3 | C3.1 35.59,43.91 U2.3 | D1.C 40.28,66.89 C5.1 40.28,59.28 U3.3 | U3.1 41.69,59.63 41.69,59.93 41.55,60.06 40.76,60.06 40.63,59.93 40.63,59.63 U3.3 | U1.3 31.83,51.49 32.1,51.49 32.24,51.35 32.24,50.56 32.1,50.43 31.83,50.43 U1.1 | U2.3 31.83,43.49 32.1,43.49 32.24,43.35 32.24,42.56 32.1,42.43 31.83,42.43 U2.1 | U2.3 31.4,44 31.4,48.27 29.88,49.79 29.88,50.4 29.27,51.01 23.78,51.01 23.63,51.17 23.63,52.54 23.78,52.69 30.64,52.69 31.4,51.93 U1.3
VSYNC  (via drill 0.25)
  Top 0.152: v74.68,55.43 71.33,55.43 68.89,52.99 68.89,51.78 J8.6
  Bottom 0.152: v74.68,55.43 74.68,55.74 77.27,58.33 77.27,81.34 78.65,82.71 78.65,87.28 77.73,88.2 H2.51
Y1_OUT
  Top 0.152: Y1.3 83.71,51.96 J5.02

## Text on the board
tNames: APU Payloadboard / Version 1.0